# Altium PCB MainBoard.PcbDoc
Units mm, origin at the board's own origin, x right, y up, seen from the top; angles counter-clockwise.
Board outline 100 x 75 mm, 2 copper layers (Top Layer, Bottom Layer); 73 components, 76 nets, 446 pads, 9 vias.
Unrouted connection lines stored in the file: 226.
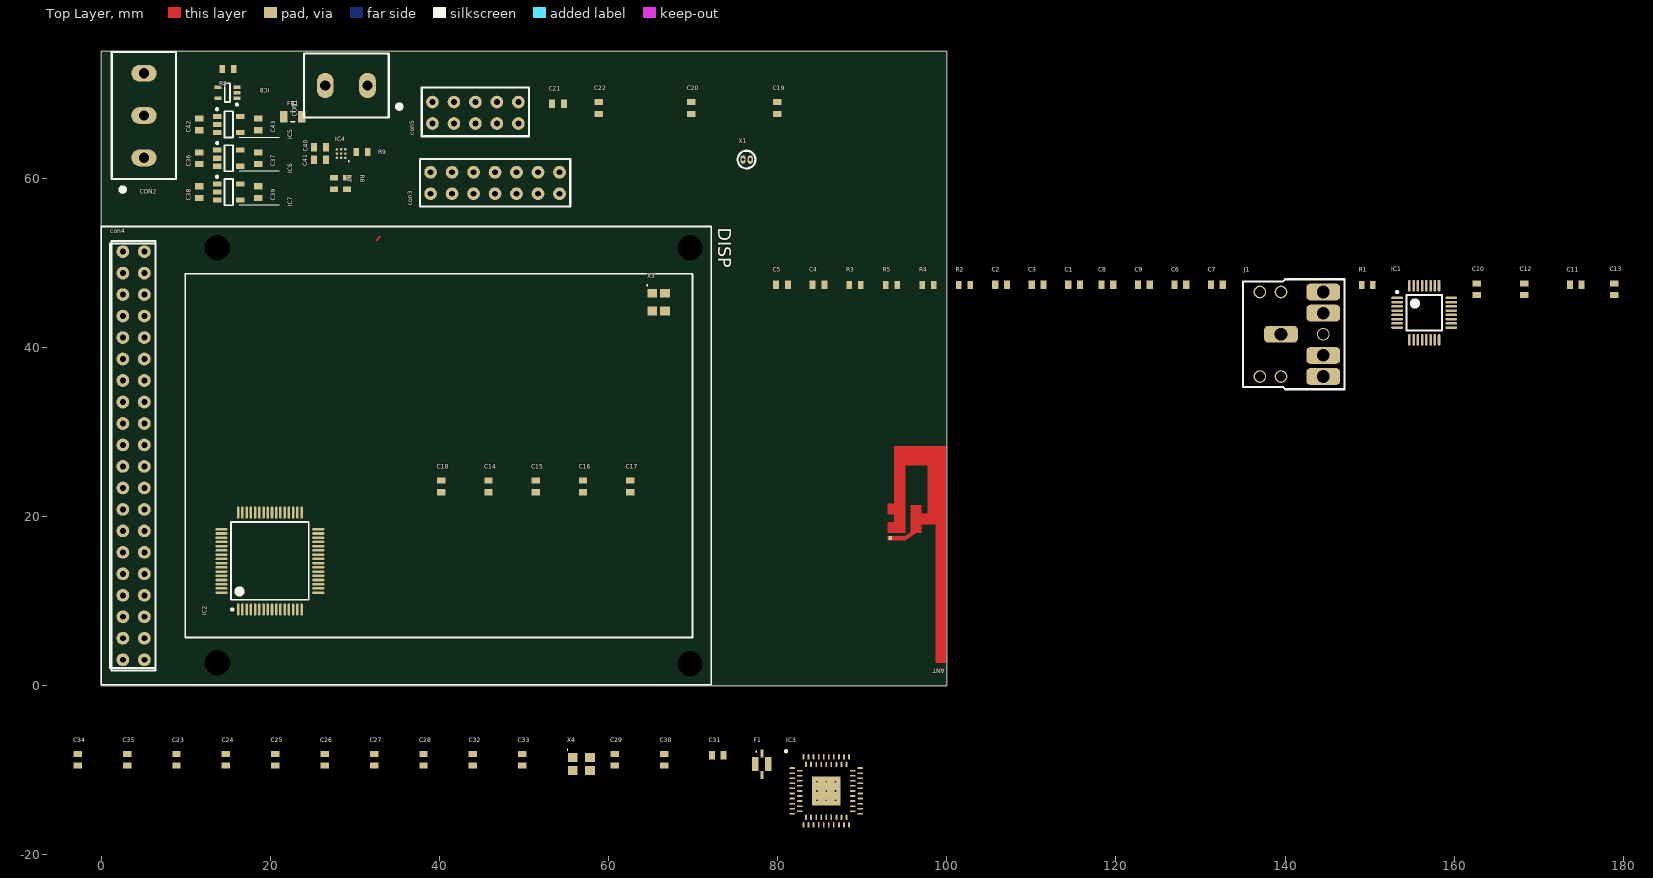
[diagram p0: Top Layer view]
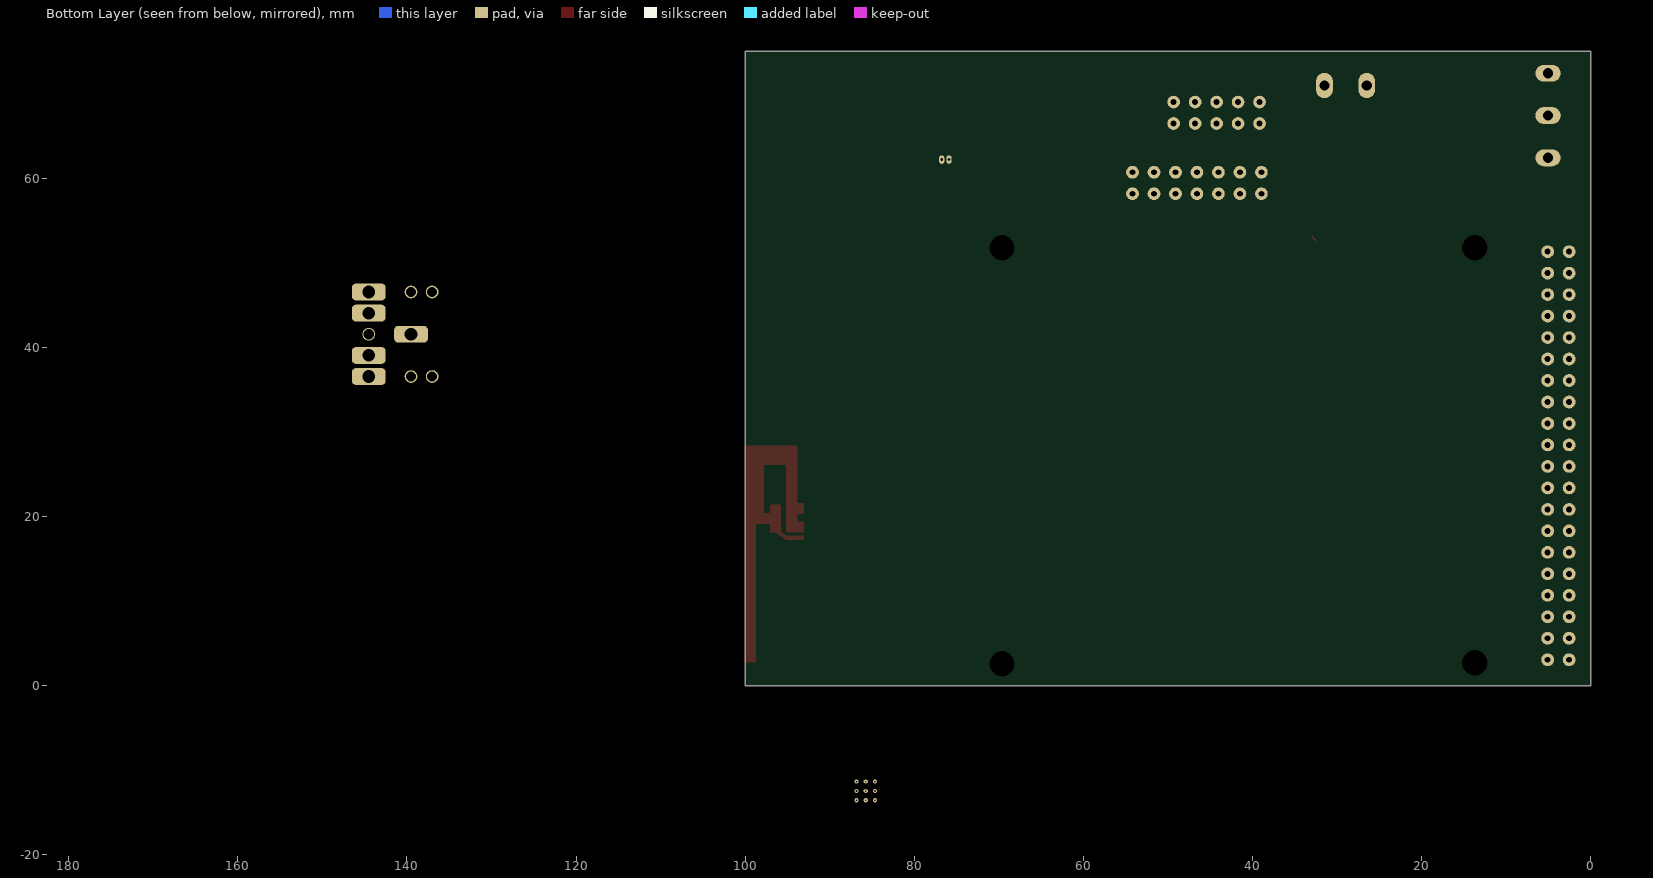
[diagram p1: Bottom Layer view, seen from below]

## Layer stack, top to bottom
Top Solder: solder mask 0.0102, Solder Resist, Dk 3.5
Top Layer: signal copper 0.0356
Dielectric 1: dielectric 0.32, FR-4, Dk 4.8
Bottom Layer: signal copper 0.0356
Bottom Solder: solder mask 0.0102, Solder Resist, Dk 3.5

## Board outline
0,0 0,75 100,75 100,0

## Design rules (kind name [scope] priority, off if disabled: settings)
Clearance [All] p1: gap=0.15
PolygonConnect [All] p1: connectstyle=Relief reliefconductorwidth=0.254 reliefentries=4 polygonreliefangle="90 Angle" airgapwidth=0.254
RoomDefinition "Main Board" [InComponentClass('Main Board')] p1: confinementstyle=ConfineIn formatcopy=TRUE lockcomponents=FALSE outline 100.164,28.575 92.925,28.575 92.925,0 100.164,0
RoomDefinition U_Supply [InComponentClass('U_Supply')] p2: confinementstyle=ConfineIn formatcopy=TRUE lockcomponents=FALSE outline 0.03,48.377 36.25,48.377 36.25,74.964 0.03,74.964
RoomDefinition U_RF [InComponentClass('U_RF')] p3: confinementstyle=ConfineIn formatcopy=TRUE lockcomponents=FALSE outline -3.793,-17.648 90.949,-17.648 90.949,-4.694 -3.793,-4.694
RoomDefinition U_MCU [InComponentClass('U_MCU')] p4: confinementstyle=ConfineIn formatcopy=TRUE lockcomponents=FALSE outline 0,0 100.05,0 100.05,75.05 0,75.05
RoomDefinition U_AFE [InComponentClass('U_AFE')] p5: confinementstyle=ConfineIn formatcopy=TRUE lockcomponents=FALSE outline 78.98,34.702 182.612,34.702 182.612,50.958 78.98,50.958
RoutingVias [All] p1: holewidth=0.5 width=0.8 viastyle="Through Hole" minholewidth=0.3 minwidth=0.45 maxholewidth=6.3 maxwidth=8
SolderMaskExpansion [All] p1: expansion=0.102
UnpouredPolygon [All] p1: allowunpoured=FALSE
Width [All] p1: maxlimit=2.54 minlimit=0.15 preferedwidth=0.254
29 further rules are at their usual default settings.

## Classes and differential pairs
component class "Main Board": ANT
component class U_AFE: C1 C2 C3 C4 C5 C6 C7 C8 C9 C10 C11 C12 C13 IC1 J1 R1 R2 R3 R4 R5
component class U_MCU: C14 C15 C16 C17 C18 C19 C20 C21 C22 con3 con4 con5 DISP IC2 X1 X3
component class U_RF: C23 C24 C25 C26 C27 C28 C29 C30 C31 C32 C33 C34 C35 F1 IC3 X4
component class U_Supply: C36 C37 C38 C39 C40 C41 C42 C43 con1 con2 FB1 IC4 IC5 IC6 IC7 IC8 R6 R7 R8 R9

## Components (designator, comment, footprint, x,y, rotation, side; value= is the part's Value field where it differs from the comment)
ANT "Antenna" ANTENNA 96.735,21.082 r270 top
C1 "47p" C0603 115.048,47.402 r0 top
C2 "47p" C0603 106.412,47.402 r0 top
C3 "6.8n" C0603 110.73,47.402 r0 top
C4 "4.7n" C0603 84.822,47.402 r0 top
C5 "4.7n" C0603 80.504,47.402 r0 top
C6 "1u" C0603 127.621,47.402 r0 top
C7 "1u" C0603 131.939,47.402 r0 top
C8 "10u" C0603 118.985,47.402 r0 top
C9 "0.1u" C0603 123.303,47.402 r0 top
C10 "1u" C0603 162.673,46.894 r90 top
C11 "1u" C0603 174.357,47.402 r0 top
C12 "0.1u" C0603 168.261,46.894 r90 top
C13 "0.1u" C0603 178.929,46.894 r90 top
C14 "100n" C0603 45.802,23.565 r90 top
C15 "100n" C0603 51.39,23.565 r90 top
C16 "100n" C0603 56.978,23.565 r90 top
C17 "10u" C0603 62.566,23.565 r90 top
C18 "100n" C0603 40.214,23.565 r90 top
C19 "15p" C0603 79.928,68.315 r90 top
C20 "15p" C0603 69.768,68.315 r90 top
C21 "8p" C0603 54.02,68.823 r0 top
C22 "8p" C0603 58.846,68.315 r90 top
C23 "0.47uF" C0603 8.907,-8.758 r90 top
C24 "0.1uF" C0603 14.749,-8.758 r90 top
C25 "0.1uF" C0603 20.591,-8.758 r90 top
C26 "0.1uF" C0603 26.433,-8.758 r90 top
C27 "0.1uF" C0603 32.275,-8.758 r90 top
C28 "0.1uF" C0603 38.117,-8.758 r90 top
C29 "1.0uF" C0603 60.723,-8.758 r90 top
C30 "1.0uF" C0603 66.565,-8.758 r90 top
C31 "22p" C0603 72.915,-8.25 r0 top
C32 "12p" C0603 43.959,-8.758 r90 top
C33 "12p" C0603 49.801,-8.758 r90 top
C34 "0.1uF" C0603 -2.777,-8.758 r90 top
C35 "0.47uF" C0603 3.065,-8.758 r90 top
C36 "1u" C0603 11.58,62.377 r90 top
C37 "1u" C0603 18.58,62.377 r90 top
C38 "1u" C0603 11.58,58.377 r90 top
C39 "1u" C0603 18.58,58.377 r90 top
C40 "1u" C0603 25.875,63.675 r0 top
C41 "0.47u" C0603 25.875,62.175 r180 top
C42 "1u" C0603 11.58,66.377 r90 top
C43 "1u" C0603 18.58,66.377 r90 top
CON1 "Terminal 2 Pin" "2 Pin 5mm Terminal Block" 29,70.975 r180 top (schematic designator con1)
CON2 "Terminal 3 Pin" "3 Pin 5mm Terminal Block" 5.05,67.425 r90 top (schematic designator con2)
con3 "14pin_conector" 14PIN_CONECTOR 46.575,59.45 r90 top
con4 "40pin_conector" 40PIN_CONECTOR 3.825,27.2 r0 top
con5 "10pin_conector" 10PIN_CONECTOR 44.25,67.75 r90 top
DISP "DISPLAY" DISPLAY 7.725,23.3 r0 top
F1 "LFB212G45BA1A234" LFB212G45SG8A127 78.122,-9.266 r0 top
FB1 "220 ohm 100 Mhz" "0805 IND" 22.65,67.275 r0 top
IC1 "ADS1291" TSQFP50P700X700X120-32N 156.45,44.1 r0 top
IC2 "MSP430FR5972IPMR" MSP430FR5972 19.95,14.75 r90 top
IC3 "CC2560" CC2560 85.742,-12.441 r0 top
IC4 "BQ27421" BQ27421 28.375,62.925 r180 top
IC5 "LP5907" SOT95P280X145-5N 15.08,66.377 r0 top
IC6 "LP5907" SOT95P280X145-5N 15.08,62.377 r0 top
IC7 "LP5907" SOT95P280X145-5N 15.08,58.377 r0 top
IC8 "LMS33460" LMS33460 14.925,70.125 r180 top
J1 "Jack 3.5mm" "JACK 3.5MM" 144.512,41.56 r0 top
R1 "47K" R0603 149.719,47.402 r0 top
R2 "47K" R0603 102.094,47.402 r0 top
R3 "1M" R0603 89.14,47.402 r0 top
R4 "100" R0603 97.776,47.402 r0 top
R5 "100" R0603 93.458,47.402 r0 top
R6 "10K" R0603 29.075,59.375 r270 top
R7 "10K" R0603 27.55,59.375 r270 top
R8 "470K" R0603 14.975,72.925 r0 top
R9 "10K" R0603 30.852,63.12 r180 top
X1 "XTAL_32768" XTAL_32768 72.308,62.219 r0 top
X3 "XTAL_16MHZ" XTAL_16_MHZ 65.924,45.355 r0 top
X4 "XTAL_26_MHZ" XTAL_26MHZ 56.786,-9.266 r0 top

## Footprints (in the part's own frame and the unit in brackets; to place one, negate y for a bottom-side part, rotate by r counter-clockwise, add the part's x,y. Pads: shape width x height; smd on the part's side, far side on the other; paste and mask are expansions set on the pad)
"2 Pin 5mm Terminal Block" [mm]
  oval 2x3 hole 1.2: 1(-2.5,0) 2(2.5,0)
  silkscreen extent -6.5,-3.8 5,3.8, body extent -5,-3.8 5,3.8, height 10
"3 Pin 5mm Terminal Block" [mm]
  oval 2x3 hole 1.2: 1(-5,0) 2(0,0) 3(5,0)
  silkscreen extent -9,-3.8 7.5,3.8, body extent -7.5,-3.8 7.5,3.8, height 10
10PIN_CONECTOR [mm]
  round 1.5 hole 0.7: 1(-1.27,5.08) 2(1.27,5.08) 3(-1.27,2.54) 4(1.27,2.54) 5(-1.27,0) 6(1.27,0) 7(-1.27,-2.54) 8(1.27,-2.54) 9(-1.27,-5.08) 10(1.27,-5.08)
  silkscreen extent -2.77,-6.35 2.98,6.35
14PIN_CONECTOR [mm]
  round 1.5 hole 0.7: 1(-1.27,7.62) 2(1.27,7.62) 3(-1.27,5.08) 4(1.27,5.08) 5(-1.27,2.54) 6(1.27,2.54) 7(-1.27,0) 8(1.27,0) 9(-1.27,-2.54) 10(1.27,-2.54) 11(-1.27,-5.08) 12(1.27,-5.08) 13(-1.27,-7.62) 14(1.27,-7.62)
  silkscreen extent -2.8,-8.89 2.83,8.89
40PIN_CONECTOR [mm]
  round 1.5 hole 0.7: 1(-1.27,-24.13) 2(-1.27,-21.59) 3(-1.27,-19.05) 4(-1.27,-16.51) 5(-1.27,-13.97) 6(-1.27,-11.43) 7(-1.27,-8.89) 8(-1.27,-6.35) 9(-1.27,-3.81) 10(-1.27,-1.27) 11(-1.27,1.27) 12(-1.27,3.81) 13(-1.27,6.35) 14(-1.27,8.89) 15(-1.27,11.43) 16(-1.27,13.97) 17(-1.27,16.51) 18(-1.27,19.05) 19(-1.27,21.59) 20(-1.27,24.13) 21(1.27,24.13) 22(1.27,21.59) 23(1.27,19.05) 24(1.27,16.51) 25(1.27,13.97) 26(1.27,11.43) 27(1.27,8.89) 28(1.27,6.35) 29(1.27,3.81) 30(1.27,1.27) 31(1.27,-1.27) 32(1.27,-3.81) 33(1.27,-6.35) 34(1.27,-8.89) 35(1.27,-11.43) 36(1.27,-13.97) 37(1.27,-16.51) 38(1.27,-19.05) 39(1.27,-21.59) 40(1.27,-24.13)
  silkscreen extent -2.6,-25.4 2.58,25.4
"0805 IND" [mm] "Chip Capacitor, 2-Leads, Body 2,00x1,25mm, IPC Medium Density"
  rect 0.9x1.4 smd: 1(-1.05,0) 2(1.05,0)
  silkscreen extent -0.2,-0.6 0.2,0.6, body extent -1,-0.6 1,0.6, height 0.95
ANTENNA [mm]
  rect 0.46x0.46 smd: 1(3.61,-3.425)
  Top Layer region: 3.38,-1.63 3.38,-1.63 2.93,-0.97 2.93,-0.3 3.84,-1.63
  Top Layer region: 3.38,-3.66 3.38,-3.66 3.38,-1.63 3.84,-1.63 3.84,-3.66
  Top Layer region: 18.33,3.25 -7.25,3.25 -7.25,-2.92 -0.417,-2.92 -0.417,-3.66 0.769,-3.66 0.769,-2.92 1.732,-2.92 1.732,-3.66 2.93,-3.66 2.93,-1.63 -5.07,-1.63 -5.07,1.04 0.73,1.04 0.73,0.24 -0.27,0.24 -0.27,-0.97 2.93,-0.97 2.93,0.24 1.93,0.24 1.93,2.04 18.33,2.04
  Top Layer lines w0.01: -0.381,-2.92 -7.25,-2.92 -7.25,3.25 18.33,3.25 18.33,2.04 1.93,2.04 1.93,0.24 2.93,0.24 2.93,-0.97 ; -0.417,-2.92 -0.417,-3.66 0.769,-3.66 0.769,-2.92 1.732,-2.92 1.732,-3.66 2.93,-3.66 2.93,-1.63 -5.07,-1.63 -5.07,1.04 0.73,1.04 0.73,0.24 -0.27,0.24 -0.27,-0.97 2.93,-0.97 ; 2.93,-0.3 3.84,-1.63 3.84,-3.66 3.38,-3.66 3.38,-1.63 2.93,-0.97
BQ27421 [mm] "BGA, 9-Leads, Body 1,62x1,58mmx0,63mm, Pitch 0,50mm"
  round 0.29 smd: A1(-0.5,0.5) A2(0,0.5) A3(0.5,0.5) B1(-0.5,0) B2(0,0) B3(0.5,0) C1(-0.5,-0.5) C2(0,-0.5) C3(0.5,-0.5)
  silkscreen extent -0.96,0.85 -0.87,0.94, body extent -0.81,-0.79 0.81,0.79, height 0.63
C0603 [mm] "Chip Capacitor, 2-Leads, Body 1,55x0,85mm, IPC Medium Density"
  rect 0.72x1 smd: 1(-0.69,0) 2(0.69,0)
  body extent -0.8,-0.48 0.8,0.47, height 0.5
CC2560 [mm] "Double Row QFN, 76-Leads, Body 8,00x8,00mm, Pitch 0,60mm, Thermal Pad 3,40x3,40mm, IPC Low Density"
  rect 3.4x3.4 smd: 77(0,0)
  oval 0.65x0.2 smd: A1(-4.025,2.7) A2(-4.025,2.1) A3(-4.025,1.5) A4(-4.025,0.9) A5(-4.025,0.3) A6(-4.025,-0.3) A7(-4.025,-0.9) A8(-4.025,-1.5) A9(-4.025,-2.1) A10(-4.025,-2.7) A21(4.025,-2.7) A22(4.025,-2.1) A23(4.025,-1.5) A24(4.025,-0.9) A25(4.025,-0.3) A26(4.025,0.3) A27(4.025,0.9) A28(4.025,1.5) A29(4.025,2.1) A30(4.025,2.7) B1(-3.125,2.4) B2(-3.125,1.8) B3(-3.125,1.2) B4(-3.125,0.6) B5(-3.125,0) B6(-3.125,-0.6) B7(-3.125,-1.2) B8(-3.125,-1.8) B9(-3.125,-2.4) B19(3.125,-2.4) B20(3.125,-1.8) B21(3.125,-1.2) B22(3.125,-0.6) B23(3.125,0) B24(3.125,0.6) B25(3.125,1.2) B26(3.125,1.8) B27(3.125,2.4)
  oval 0.2x0.65 smd: A11(-2.7,-4.025) A12(-2.1,-4.025) A13(-1.5,-4.025) A14(-0.9,-4.025) A15(-0.3,-4.025) A16(0.3,-4.025) A17(0.9,-4.025) A18(1.5,-4.025) A19(2.1,-4.025) A20(2.7,-4.025) A31(2.7,4.025) A32(2.1,4.025) A33(1.5,4.025) A34(0.9,4.025) A35(0.3,4.025) A36(-0.3,4.025) A37(-0.9,4.025) A38(-1.5,4.025) A39(-2.1,4.025) A40(-2.7,4.025) B10(-2.4,-3.125) B11(-1.8,-3.125) B12(-1.2,-3.125) B13(-0.6,-3.125) B14(0,-3.125) B15(0.6,-3.125) B16(1.2,-3.125) B17(1.8,-3.125) B18(2.4,-3.125) B28(2.4,3.125) B29(1.8,3.125) B30(1.2,3.125) B31(0.6,3.125) B32(0,3.125) B33(-0.6,3.125) B34(-1.2,3.125) B35(-1.8,3.125) B36(-2.4,3.125)
  silkscreen extent -4.87,4.58 -4.62,4.82, body extent -4.05,-4.05 4.05,4.05, height 0.9
DISPLAY [mm]
  round 1.5 hole 0.7: 1(-5.15,-20.23) 2(-5.15,-17.69) 3(-5.15,-15.15) 4(-5.15,-12.61) 5(-5.15,-10.07) 6(-5.15,-7.53) 7(-5.15,-4.99) 8(-5.15,-2.45) 9(-5.15,0.09) 10(-5.15,2.63) 11(-5.15,5.17) 12(-5.15,7.71) 13(-5.15,10.25) 14(-5.15,12.79) 15(-5.15,15.33) 16(-5.15,17.87) 17(-5.15,20.41) 18(-5.15,22.95) 19(-5.15,25.49) 20(-5.15,28.03) 21(-2.61,28.03) 22(-2.61,25.49) 23(-2.61,22.95) 24(-2.61,20.41) 25(-2.61,17.87) 26(-2.61,15.33) 27(-2.61,12.79) 28(-2.61,10.25) 29(-2.61,7.71) 30(-2.61,5.17) 31(-2.61,2.63) 32(-2.61,0.09) 33(-2.61,-2.45) 34(-2.61,-4.99) 35(-2.61,-7.53) 36(-2.61,-10.07) 37(-2.61,-12.61) 38(-2.61,-15.15) 39(-2.61,-17.69) 40(-2.61,-20.23)
  round 0 hole 3: ""(6,-20.6) ""(6,28.5) ""(61.9,-20.7) ""(61.9,28.5)
  silkscreen extent -7.7,-23.2 64.4,31
"JACK 3.5MM" [mm]
  rrect50% 4x2 hole 1.5: 1(-5,0) 2(0,-5) 3(0,5) 4(0,-2.5) 5(0,2.5)
  round 1.5 hole 1.2 unplated: ""(-7.5,-5) ""(-7.5,5) ""(-5,-5) ""(-5,5) ""(0,0)
  silkscreen extent -9.5,-6.5 2.5,6.5
LFB212G45SG8A127 [mm] "DFN, 4-Leads, Body 2,00x1,25mm, Pitch 1,50mm, IPC Medium Density"
  rect 0.75x1.65 smd: 1(-0.762,0) 3(0.762,0)
  rect 0.35x0.95 smd: 2(0,-1.27) 4(0,1.27)
  silkscreen extent -0.72,1.43 -0.63,1.52, body extent -0.67,-1.07 0.67,1.08, height 1
LMS33460 [mm] "SOT23, 5-Leads, Body 2,00x2,10mm, Pitch 0,65mm, IPC Medium Density"
  rect 0.85x0.4 smd: 1(-1.125,0.65) 2(-1.125,0) 3(-1.125,-0.65) 4(1.125,-0.65) 5(1.125,0.65)
  silkscreen extent -1.25,-1.1 0.3,1.52, body extent -0.7,-1.07 0.7,1.08, height 1.1
MSP430FR5972 [mm] "TSQFP, 64-Leads, Body 10,00x10,00mm, Pitch 0,50mm, IPC Medium Density"
  oval 1.45x0.3 smd: 1(-5.725,3.75) 2(-5.725,3.25) 3(-5.725,2.75) 4(-5.725,2.25) 5(-5.725,1.75) 6(-5.725,1.25) 7(-5.725,0.75) 8(-5.725,0.25) 9(-5.725,-0.25) 10(-5.725,-0.75) 11(-5.725,-1.25) 12(-5.725,-1.75) 13(-5.725,-2.25) 14(-5.725,-2.75) 15(-5.725,-3.25) 16(-5.725,-3.75) 33(5.725,-3.75) 34(5.725,-3.25) 35(5.725,-2.75) 36(5.725,-2.25) 37(5.725,-1.75) 38(5.725,-1.25) 39(5.725,-0.75) 40(5.725,-0.25) 41(5.725,0.25) 42(5.725,0.75) 43(5.725,1.25) 44(5.725,1.75) 45(5.725,2.25) 46(5.725,2.75) 47(5.725,3.25) 48(5.725,3.75)
  oval 0.3x1.45 smd: 17(-3.75,-5.725) 18(-3.25,-5.725) 19(-2.75,-5.725) 20(-2.25,-5.725) 21(-1.75,-5.725) 22(-1.25,-5.725) 23(-0.75,-5.725) 24(-0.25,-5.725) 25(0.25,-5.725) 26(0.75,-5.725) 27(1.25,-5.725) 28(1.75,-5.725) 29(2.25,-5.725) 30(2.75,-5.725) 31(3.25,-5.725) 32(3.75,-5.725) 49(3.75,5.725) 50(3.25,5.725) 51(2.75,5.725) 52(2.25,5.725) 53(1.75,5.725) 54(1.25,5.725) 55(0.75,5.725) 56(0.25,5.725) 57(-0.25,5.725) 58(-0.75,5.725) 59(-1.25,5.725) 60(-1.75,5.725) 61(-2.25,5.725) 62(-2.75,5.725) 63(-3.25,5.725) 64(-3.75,5.725)
  silkscreen extent -5.85,-4.6 4.6,4.6, body extent -5,-5 5,5, height 1.6
R0603 [mm] "Chip Resistor, 2-Leads, Body 1,55x0,85mm, IPC Medium Density"
  rect 0.65x0.95 smd: 1(-0.675,0) 2(0.675,0)
  body extent -0.8,-0.48 0.8,0.48, height 0.5
SOT95P280X145-5N [mm] "SOT23, 5-Leads, Body 2,90x2,80mm, Pitch 0,95mm, IPC Medium Density"
  rect 1x0.6 smd: 1(-1.375,0.95) 2(-1.375,0) 3(-1.375,-0.95) 4(1.375,-0.95) 5(1.375,0.95)
  silkscreen extent -1.5,-1.55 0.5,1.92, body extent -0.88,-1.52 0.87,1.53, height 1.45
TSQFP50P700X700X120-32N [mm] "TSQFP, 32-Leads, Body 5,00x5,00mm, Pitch 0,50mm, IPC Medium Density"
  oval 1.4x0.3 smd: 1(-3.2,1.75) 2(-3.2,1.25) 3(-3.2,0.75) 4(-3.2,0.25) 5(-3.2,-0.25) 6(-3.2,-0.75) 7(-3.2,-1.25) 8(-3.2,-1.75) 17(3.2,-1.75) 18(3.2,-1.25) 19(3.2,-0.75) 20(3.2,-0.25) 21(3.2,0.25) 22(3.2,0.75) 23(3.2,1.25) 24(3.2,1.75)
  oval 0.3x1.4 smd: 9(-1.75,-3.2) 10(-1.25,-3.2) 11(-0.75,-3.2) 12(-0.25,-3.2) 13(0.25,-3.2) 14(0.75,-3.2) 15(1.25,-3.2) 16(1.75,-3.2) 25(1.75,3.2) 26(1.25,3.2) 27(0.75,3.2) 28(0.25,3.2) 29(-0.25,3.2) 30(-0.75,3.2) 31(-1.25,3.2) 32(-1.75,3.2)
  silkscreen extent -3.32,-2.1 2.1,2.57, body extent -2.5,-2.5 2.5,2.5, height 1.2
XTAL_16_MHZ [mm] "DFN, 4-Leads, Body 3,10x2,50mm, Pitch 1,50mm, IPC Medium Density"
  rect 1.15x1.05 smd: 1(-0.75,1.05) 2(-0.75,-1.05) 3(0.75,-1.05) 4(0.75,1.05)
  silkscreen extent -1.4,1.95 -1.3,2.05, body extent -1.35,-1.6 1.35,1.6, height 0.75
XTAL_26MHZ [mm] "DFN, 4-Leads, Body 2,50x3,20mm, Pitch 2,20mm, IPC Medium Density"
  rect 1.15x1.05 smd: 1(-1.016,0.762) 2(-1.016,-0.762) 3(1.016,-0.762) 4(1.016,0.762)
  silkscreen extent -1.7,1.65 -1.6,1.75, body extent -1.65,-1.3 1.65,1.3, height 0.9
XTAL_32768 [mm]
  oval 0.6x1 hole 0.35: 1(3.581,0) 2(4.445,0)
  silkscreen extent 2.95,-1.05 5.05,1.05

## Part data
C1 C2 C3 C4 C5 C6 C7 C8 C9 C10 C11 C12 C13 C14 C15 C16 C17 C18 C19 C20 C21 C22 C23 C24 C25 C26 C27 C28 C29 C30 C31 C32 C33 C34 C35 C36 C37 C38 C39 C40 C41 C42 C43: library part Capacitor, "Capacitor"
CON1: library part "Terminal Block 2 Pin", "Terminal Block, 2 Pin"
CON2: library part "Terminal Block 3 Pin", "Terminal Block, 3 Pin"
FB1: library part Ferrita, "INDUCTOR, 0.04OHM, 3A, 0805"
R1 R2 R3 R4 R5 R6 R7 R8 R9: library part Resistor, "Resistor"
X3: library part XTAL_16_MHz

## Via types
v1: diameter 0.5, hole 0.2, Top Layer to Bottom Layer, 9 vias

## Nets (pads, with @x,y where several pads share a name; then routed paths per layer and width w, separated by ;. In a path a pad name is that pad's centre, name@x,y a point inside that pad or via, vN(x,y) a via of type N, cw(c..) or ccw(c..) an arc to the next point about the centre after c; other vN are vias at no path point)
AFE_DRDY: con4.34 IC2.42
AFEVDD: C11.2 C13.2 FB1.2 IC1.23
AGND: C1.1 C2.2 C6.1 C7.1 C8.1 C9.1 C10.1 C11.1 C12.1 C13.1 C14.1 C15.1 C16.1 C17.1 C18.1 C19.2 C20.2 C21.1 C22.1 C23.1 C24.1 C25.1 C26.1 C27.1 C28.1 C29.1 C30.1 C32.1 C33.1 C34.1 C35.1 C36.1 C37.1 C38.1 C39.1 C42.1 C43.1 CON2.3 con4.20 con5.5 F1.1 F1.3 IC1.10 IC1.13 IC1.24 IC2.17 IC2.39 IC2.50 IC2.53 IC2.56 IC2.62 IC3.A10 IC3.A11 IC3.A24 IC3.A28 IC3.B3 IC3.B9 IC3.B10 IC3.B11 IC3.B34 IC5.2 IC6.2 IC7.2 IC8.3 J1.1 R4.2 R5.2 X3.2 X3.4 X4.2 X4.4
AVDD: C10.2 C12.2 C37.2 IC1.5 IC1.6 IC1.12 IC1.28 IC1.29 IC1.31 IC1.32 IC6.5 R3.2
BSL_RX: con5.3 IC2.32
BSL_TX: con5.1 IC2.33
BYPASS: C41.1 IC4.B3
CHARGER+: C36.2 C38.2 C42.2 CON2.1 IC4.C2 IC5.1 IC5.3 IC6.1 IC6.3 IC7.1 IC7.3 IC8.5
CHARGING: CON2.2 IC2.36
CS: con4.6 IC2.35
CTS: IC2.2 IC3.A29
DISP_CLK: con4.29 IC2.28
DISP_CS: con4.30 IC2.29
DISP_DIN: con4.31 IC2.26
DISP_DOUT: con4.33 IC2.27
DISPLAY_D\R\D\Y\: IC1.22
DISPLAY_DRDY: IC2.41
DVDD: C14.2 C15.2 C16.2 C17.2 C18.2 C30.2 C43.2 con4.19 FB1.1 IC2.18 IC2.40 IC2.49 IC2.63 IC3.B5 IC3.B6 IC5.5 R6.2 R7.2 R8.2
F_CS: con4.5 IC2.30
GPOUT: IC2.4 IC4.A1
HFXIN: C22.2 IC2.55 X3.3
HFXOUT: C21.2 IC2.54 X3.1
MR: con3.11 con5.4 IC2.20 IC8.4 R8.1
NetANT_0: F1.2
NetC1_2: C1.2 C3.2 IC1.3 R1.2
NetC2_1: C2.1 C3.1 IC1.4 R2.2
NetC4_1: C4.1 IC1.2
NetC4_2: C4.2 IC1.1
NetC5_1: C5.1 IC1.8
NetC5_2: C5.2 IC1.7
NetC6_2: C6.2 IC1.27
NetC7_2: C7.2 IC1.11
NetC8_2: C8.2 C9.2 IC1.9
NetC19_1: C19.1 IC2.51 X1.1
NetC20_1: C20.1 IC2.52 X1.2
NetC23_2: C23.2 C34.2 C35.2 IC3.A2 IC3.A3 IC3.B15 IC3.B26 IC3.B27 IC3.B35 IC3.B36
NetC25_2: C25.2 IC3.A12
NetC26_2: C26.2 IC3.A7
NetC27_2: C27.2 IC3.A8
NetC28_2: C28.2 IC3.B1
NetC29_2: C29.2 IC3.A5 IC3.A9 IC3.B2 IC3.B7
NetC31_1: C31.1 IC3.B8
NetC31_2: C31.2 F1.4
NetC32_2: C32.2 IC3.B4 X4.3
NetC33_2: C33.2 IC3.A4 X4.1
NetIC1_14: IC1.14 IC2.38
NetIC1_15: IC1.15 IC2.37
NetIC1_16: IC1.16 IC2.57
NetIC1_18: IC1.18 IC2.58
NetIC1_19: IC1.19 IC2.60
NetIC1_20: IC1.20 IC2.59
NetIC1_21: IC1.21 IC2.61
NetIC1_25: IC1.25 R5.1
NetIC1_26: IC1.26 R4.1
NetIC1_30: IC1.30 R3.1
NetIC2_1: IC2.1 IC3.A33
NetIC2_25: IC2.25 IC3.A6
NetIC2_64: IC2.64 IC3.A26
NetIC4_B1: IC4.B1 R9.2
NetJ1_2: J1.2 R2.1
NetJ1_3: J1.3 R1.1
PACK+: C40.2 CON1.2 IC4.C3
PACK-: C40.1 C41.2 CON1.1 IC4.B2 IC4.C1 R9.1 | length 0.7
  Top Layer w0.152: 32.525,52.625 33.025,53.125
RD: con4.15 IC2.7
REST: con4.4 IC2.34
RFVDD: C24.2 C39.2 IC3.A17 IC3.A34 IC3.A38 IC3.B18 IC3.B19 IC3.B21 IC3.B22 IC3.B25 IC7.5
RS: con4.17 IC2.10
RTS: IC2.3 IC3.A32
SCL: IC2.15 IC4.A3 R7.1
SDA: IC2.16 IC4.A2 R6.1
TCK: con3.7 IC2.24
TCLK: con3.3 IC2.22
TDO: con3.1 IC1.17 IC2.21
TEST: con3.8 con5.7 IC2.19
TMS: con3.5 IC2.23 IC3.A25
WR: con4.16 IC2.8
pads on no net: ANT.1 con3.2 con3.4 con3.6 con3.9 con3.10 con3.12 con3.13 con3.14 con4.1 con4.2 con4.3 con4.7 con4.8 con4.9 con4.10 con4.11 con4.12 con4.13 con4.14 con4.18 con4.21 con4.22 con4.23 con4.24 con4.25 con4.26 con4.27 con4.28 con4.32 con4.35 con4.36 con4.37 con4.38 con4.39 con4.40 con5.2 con5.6 con5.8 con5.9 con5.10 DISP. DISP.1 DISP.2 DISP.3 DISP.4 DISP.5 DISP.6 DISP.7 DISP.8 DISP.9 DISP.10 DISP.11 DISP.12 DISP.13 DISP.14 DISP.15 DISP.16 DISP.17 DISP.18 DISP.19 DISP.20 DISP.21 DISP.22 DISP.23 DISP.24 DISP.25 DISP.26 DISP.27 DISP.28 DISP.29 DISP.30 DISP.31 DISP.32 DISP.33 DISP.34 DISP.35 DISP.36 DISP.37 DISP.38 DISP.39 DISP.40 IC2.5 IC2.6 IC2.9 IC2.11 IC2.12 IC2.13 IC2.14 IC2.31 IC2.43 IC2.44 IC2.45 IC2.46 IC2.47 IC2.48 IC3.77 IC3.A1 IC3.A13 IC3.A14 IC3.A15 IC3.A16 IC3.A18 IC3.A19 IC3.A20 IC3.A21 IC3.A22 IC3.A23 IC3.A27 IC3.A30 IC3.A31 IC3.A35 IC3.A36 IC3.A37 IC3.A39 IC3.A40 IC3.B12 IC3.B13 IC3.B14 IC3.B16 IC3.B17 IC3.B20 IC3.B23 IC3.B24 IC3.B28 IC3.B29 IC3.B30 IC3.B31 IC3.B32 IC3.B33 IC5.4 IC6.4 IC7.4 IC8.1 IC8.2 J1. J1.4 J1.5
copper on no net:
  other v1: 84.642,-13.541 85.742,-13.541 86.842,-13.541 84.642,-12.441 85.742,-12.441 86.842,-12.441 84.642,-11.341 85.742,-11.341 86.842,-11.341

## Silkscreen, mask and mechanical layers (free items; w line width, h text height)
Top Overlay:
  lines w0.1: 16.33,56.877 21.08,56.877 ; 16.33,60.877 21.08,60.877 ; 16.33,64.877 21.08,64.877
Mechanical 1:
  the board outline again, w0.05